# Altium PCB PCB1.PcbDoc (part 1 of 2)
Units mil, origin at the board's own origin, x right, y up, seen from the top; angles counter-clockwise.
Board outline 13600 x 4300 mil, 2 copper layers (Top Layer, Bottom Layer); 273 components, 193 nets, 742 pads, 0 vias.
Unrouted connection lines stored in the file: 1.
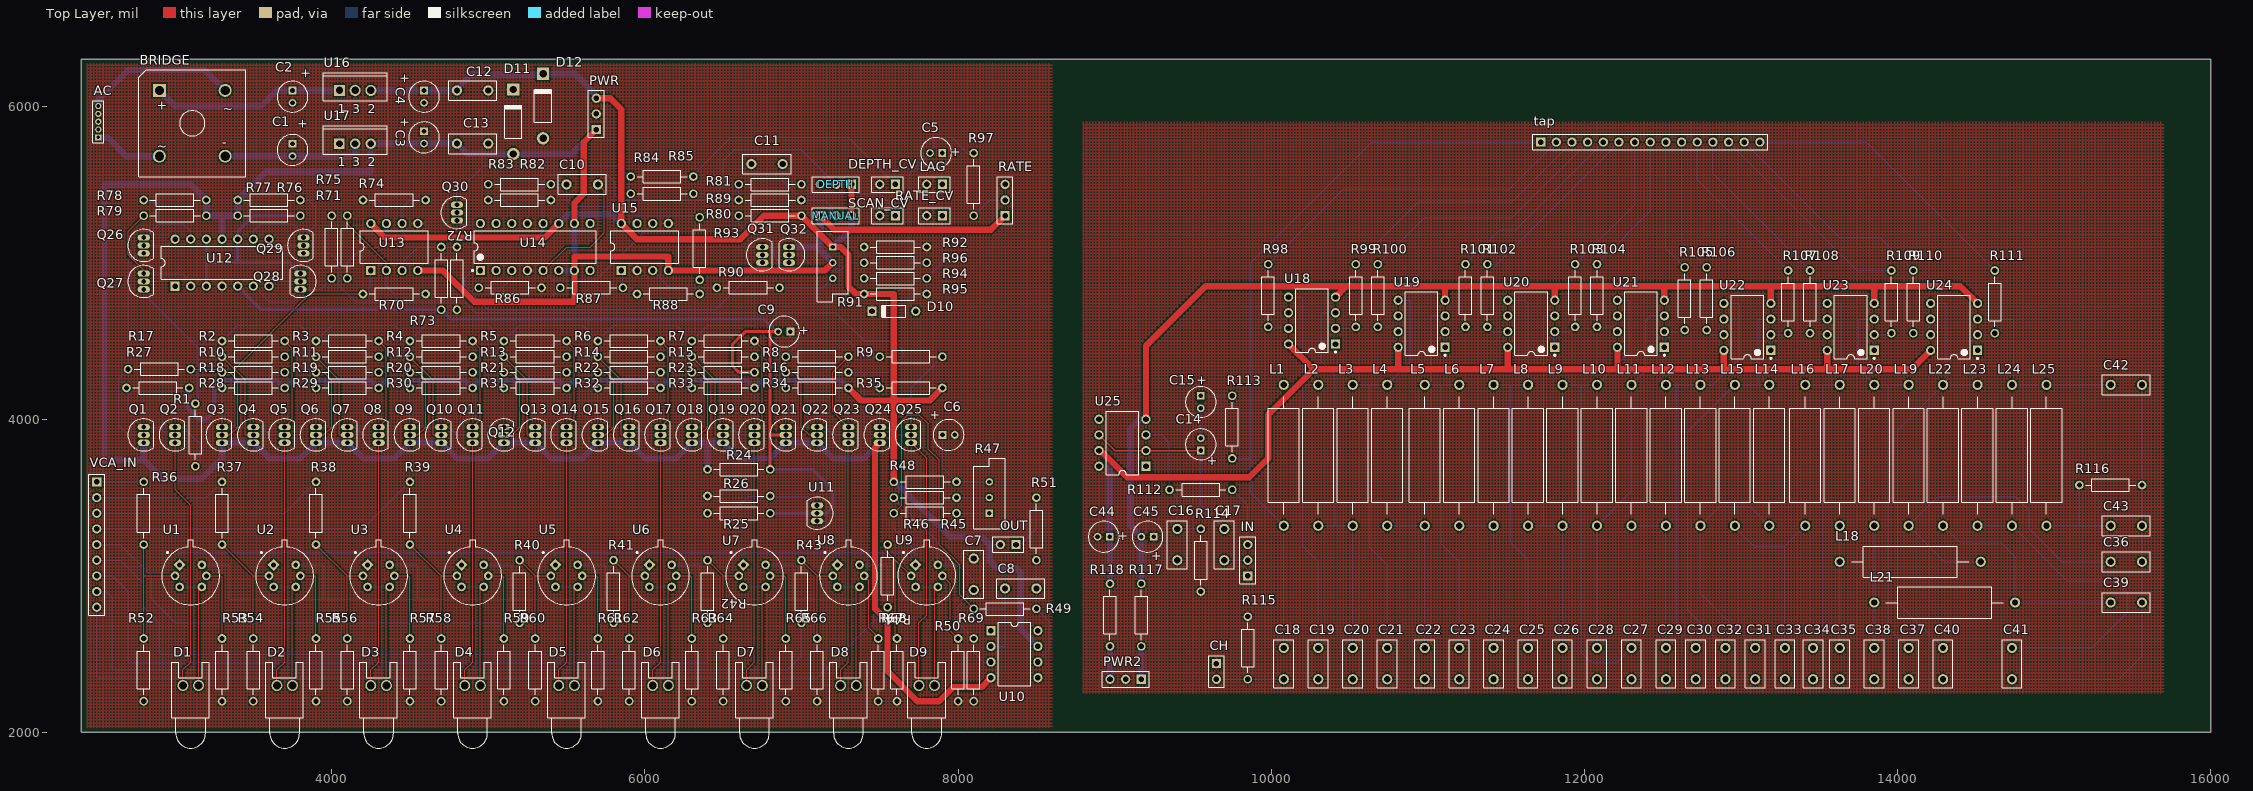
[diagram p0: Top Layer view]
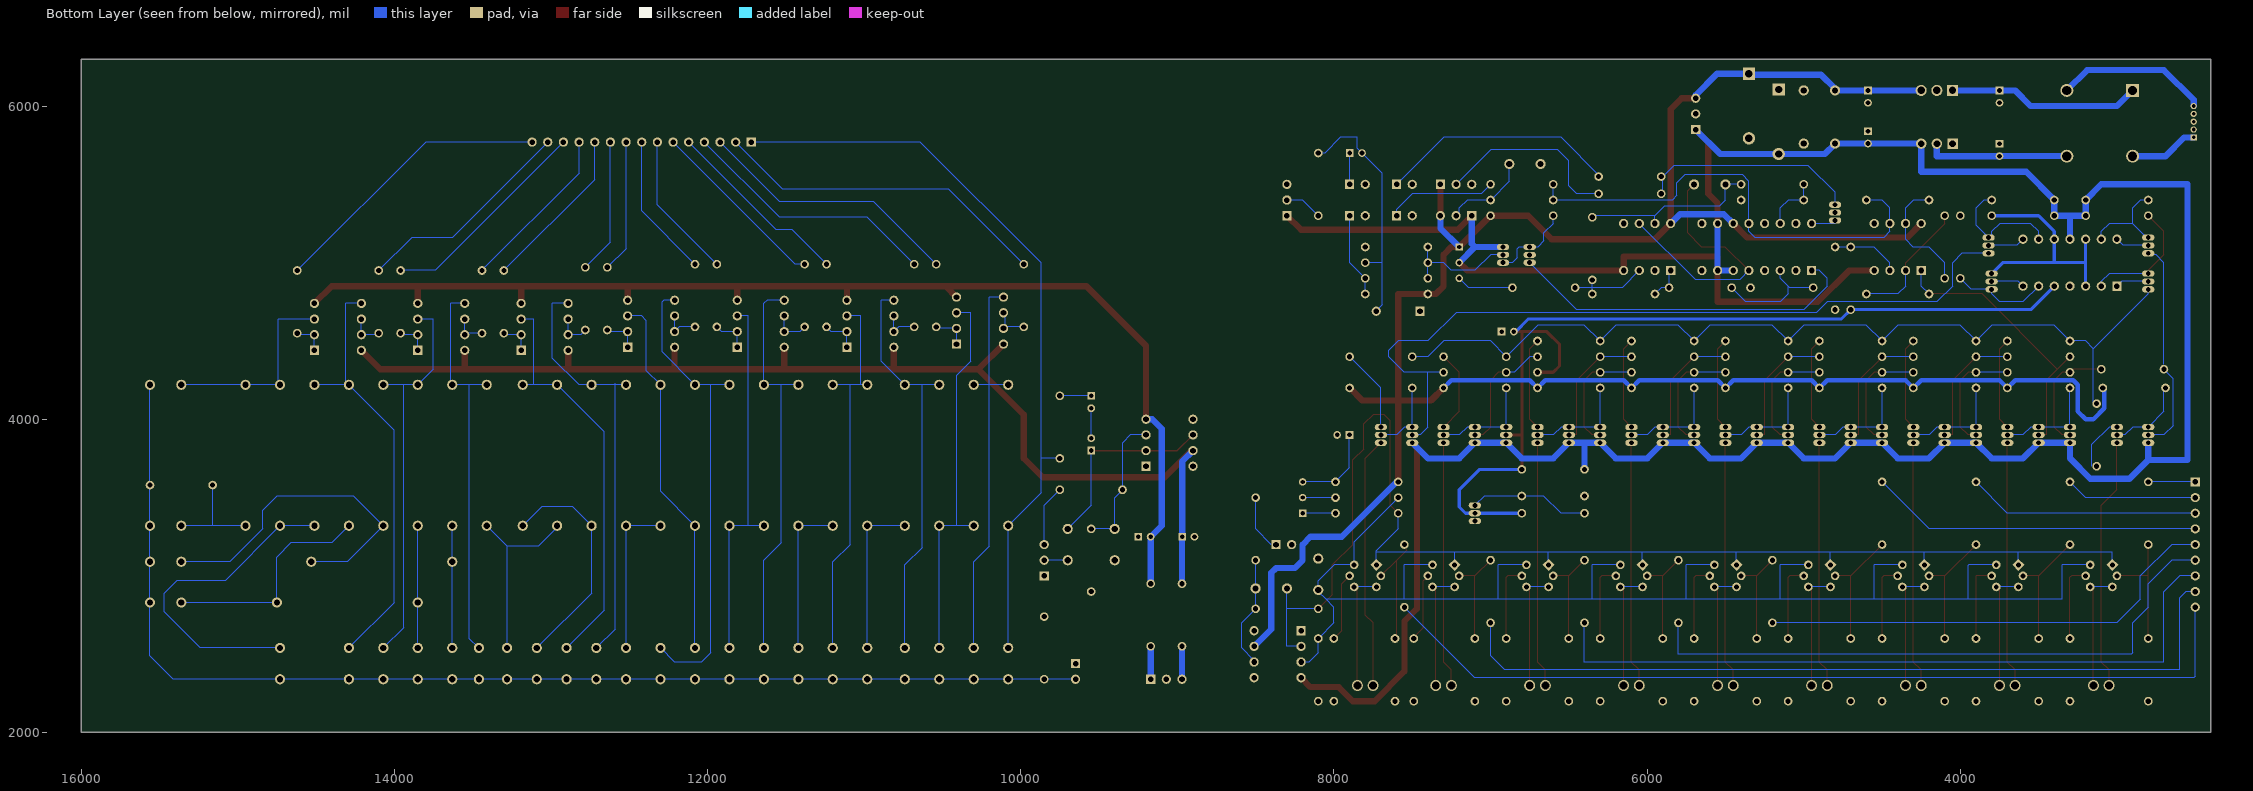
[diagram p1: Bottom Layer view, seen from below]

## Layer stack, top to bottom
Top Layer: signal copper 1.4
Dielectric: core 12.6, FR-4, Dk 4.8
Bottom Layer: signal copper 1.4

## Board outline
2400,6300 2400,2000 16000,2000 16000,6300

## Design rules (kind name [scope] priority, off if disabled: settings)
Clearance [All] p1: gap=7.87
ComponentClearance ComponentClearance_1 [All] p2: gap=10 collisioncheckmode=3 verticalgap=10 showdistances=FALSE
DiffPairsRouting DiffPairsRouting_1 [All] p2: maxlimit=10 minlimit=10 mostfreqgap=10 maxuncoupledlength=500
FanoutControl Fanout_LCC [IsLCC] p1: bgadir=Out bgaviamode=Centered fanoutstyle=Auto fanoutdirection=Alternating viagrid=1 // Fanout_LCC (Default Rule)
FanoutControl Fanout_BGA [IsBGA] p2: bgadir=Out bgaviamode=Centered fanoutstyle=Auto fanoutdirection=Alternating viagrid=1 // Fanout_BGA (Default Rule)
FanoutControl Fanout_Default [All] p4: bgadir=Out bgaviamode=Centered fanoutstyle=Auto fanoutdirection=Alternating viagrid=1 // Fanout_Default (Default Rule)
FanoutControl Fanout_Small [(CompPinCount < 5)] p5: bgadir=Out bgaviamode=Centered fanoutstyle=Auto fanoutdirection=OutThenIn viagrid=1 // Fanout_Small (Default Rule)
FanoutControl Fanout_BGA_1 [IsBGA] p6: bgadir=Out bgaviamode=Centered fanoutstyle=Auto fanoutdirection=Alternating viagrid=1 // Fanout_BGA (Default Rule)
FanoutControl Fanout_LCC_1 [IsLCC] p7: bgadir=Out bgaviamode=Centered fanoutstyle=Auto fanoutdirection=Alternating viagrid=1 // Fanout_LCC (Default Rule)
FanoutControl Fanout_SOIC_1 [IsSOIC] p8: bgadir=Out bgaviamode=Centered fanoutstyle=Auto fanoutdirection=Alternating viagrid=1 // Fanout_SOIC (Default Rule)
FanoutControl Fanout_Small_1 [(CompPinCount < 5)] p9: bgadir=Out bgaviamode=Centered fanoutstyle=Auto fanoutdirection=OutThenIn viagrid=1 // Fanout_Small (Default Rule)
FanoutControl Fanout_Default_1 [All] p10: bgadir=Out bgaviamode=Centered fanoutstyle=Auto fanoutdirection=Alternating viagrid=1 // Fanout_Default (Default Rule)
Height Height_1 [All] p2: minheight=0 maxheight=1000 prefheight=500
HoleSize HoleSize_1 [All] p2: absolutevalues=TRUE maxlimit=100 minlimit=1 maxpercent=80.000 minpercent=20.000
LayerPairs LayerPairs_1 [All] p2: enforce=TRUE
PasteMaskExpansion PasteMaskExpansion_1 [All] p2: expansion=0
PlaneClearance PlaneClearance_1 [All] p2: clearance=20
PolygonConnect [All] p1: connectstyle=Relief reliefconductorwidth=10 reliefentries=4 polygonreliefangle="90 Angle"
PolygonConnect PolygonConnect_1 [All] p2: connectstyle=Relief reliefconductorwidth=10 reliefentries=4 polygonreliefangle="90 Angle"
RoomDefinition Sheet1 [InComponentClass('Sheet1')] p1: confinementstyle=ConfineIn formatcopy=TRUE lockcomponents=FALSE outline 2430,2020 8610,2020 8610,6280 2430,6280
RoomDefinition Sheet2 [InComponentClass('Sheet2')] p2: confinementstyle=ConfineIn formatcopy=TRUE lockcomponents=FALSE outline 8730,2200 15740,2200 15740,5960 8730,5960
RoutingPriority RoutingPriority_1 [All] p2: routingpriority=0
RoutingTopology RoutingTopology_1 [All] p2: topology=Shortest
RoutingVias [All] p1: holewidth=23.62 width=39.37 viastyle="Through Hole" minholewidth=28 minwidth=50 maxholewidth=28 maxwidth=50
ShortCircuit ShortCircuit_1 [All] p2: allowed=FALSE
SilkscreenOverComponentPads [All] p1: minsilkscreentomaskgap=10
SolderMaskExpansion [All] p1: expansion=4
SolderMaskExpansion SolderMaskExpansion_1 [All] p2: expansion=4
TestPointUsage [All] p1: valid=0 allowmultiple=FALSE
TestPointUsage TestPointUsage_1 [All] p2: valid=0 allowmultiple=FALSE
Testpoint [All] p1: side=15 testpointundercomponent=TRUE minsize=40 maxsize=100 preferedsize=60 minholesize=0 maxholesize=40 preferedholesize=32 testpointgrid=1 style=1023 order=0-112345678
Testpoint Testpoint_1 [All] p2: side=15 testpointundercomponent=TRUE minsize=40 maxsize=100 preferedsize=60 minholesize=0 maxholesize=40 preferedholesize=32 testpointgrid=1 style=1023 order=0123456789
UnRoutedNet UnRoutedNet_1 [All] p2:
Width [All] p1: maxlimit=7.87 minlimit=7.87 preferedwidth=7.87
19 further rules are at their usual default settings.

## Classes and differential pairs
component class Sheet2: C14 C15 C16 C17 C18 C19 C20 C21 C22 C23 C24 C25 C26 C27 C28 C29 C30 C31 C32 C33 C34 C35 C36 C37 C38 C39 C40 C41 C42 C43 C44 C45 CH IN L1 L2 L3 L4 L5 L6 L7 L8 L9 L10 L11 L12 L13 L14 L15 L16 L17 L18 L19 L20 L21 L22 L23 L24 L25 PWR2 R98 R99 R100 R101 R102 R103 R104 R105 R106 R107 R108 R109 R110 R111 R112 R113 R114 R115 R116 R117 R118 tap U18 U19 U20 U21 U22 U23 U24 U25
component class Sheet1: AC BRIDGE C1 C2 C3 C4 C5 C6 C7 C8 C9 C10 C11 C12 C13 D1 D2 D3 D4 D5 D6 D7 D8 D9 D10 D11 D12 DEPTH DEPTH_CV LAG MANUAL OUT PWR Q1 Q2 Q3 Q4 Q5 Q6 Q7 Q8 Q9 Q10 Q11 Q12 Q13 Q14 Q15 Q16 Q17 Q18 Q19 Q20 Q21 Q22 Q23 Q24 Q25 Q26 Q27 Q28 Q29 Q30 Q31 Q32 R1 R2 R3 R4 R5 R6 R7 R8 R9 R10 R11 R12 R13 R14 R15 R16 R17 R18 R19 R20 R21 R22 R23 R24 R25 R26 R27 R28 R29 R30 R31 R32 R33 R34 R35 R36 R37 R38 R39 R40 R41 R42 R43 R44 R45 R46 R47 R48 R49 R50 R51 R52 R53 R54 R55 R56 R57 R58 R59 R60 R61 R62 R63 R64 R65 R66 R67 R68 R69 R70 R71 R72 R73 R74 R75 R76 R77 R78 R79 R80 R81 R82 R83 R84 R85 R86 R87 R88 R89 R90 R91 R92 R93 R94 R95 R96 R97 RATE RATE_CV SCAN_CV U1 U2 U3 U4 U5 U6 U7 U8 U9 U10 U11 U12 U13 U14 U15 U16 U17 VCA_IN

## Components (designator, comment, footprint, x,y, rotation, side; value= is the part's Value field where it differs from the comment)
AC "MHDR1X5" MHDR1X5 2510,5800 r90 top
BRIDGE "Bridge2" D-46_6A 3110,5890 r0 top
C1 "Cap Pol1" B 3750,5720 r270 top
C2 "Cap Pol1" B 3750,6060 r270 top
C3 "Cap Pol1" B 4590,5800 r270 top
C4 "Cap Pol1" B 4590,6060 r270 top
C5 "Cap Pol1" B 7860,5700 r180 top
C6 "Cap Pol1" B 7940,3900 r0 top
C7 "Cap" VP45-3.2 8100,3010 r270 top
C8 "Cap" VP45-3.2 8400,2920 r180 top
C9 "Cap Pol1" B 6890,4560 r180 top
C10 "Cap" VP45-3.2 5600,5500 r0 top
C11 "Cap" VP45-3.2 6780,5630 r180 top
C12 "Cap" VP45-3.2 4900,6100 r0 top
C13 "Cap" VP45-3.2 4900,5760 r180 top
C14 "Cap Pol1" B 9550,3840 r90 top
C15 "Cap Pol1" B 9550,4110 r270 top
C16 "Cap" VP45-3.2 9400,3200 r90 top
C17 "Cap" VP45-3.2 9700,3200 r270 top
C18 "Cap" VP45-3.2 10080,2440 r90 top
C19 "Cap" VP45-3.2 10300,2440 r90 top
C20 "Cap" VP45-3.2 10520,2440 r90 top
C21 "Cap" VP45-3.2 10740,2440 r90 top
C22 "Cap" VP45-3.2 10980,2440 r90 top
C23 "Cap" VP45-3.2 11200,2440 r90 top
C24 "Cap" VP45-3.2 11420,2440 r90 top
C25 "Cap" VP45-3.2 11640,2440 r90 top
C26 "Cap" VP45-3.2 11860,2440 r90 top
C27 "Cap" VP45-3.2 12300,2440 r90 top
C28 "Cap" VP45-3.2 12080,2440 r90 top
C29 "Cap" VP45-3.2 12520,2440 r90 top
C30 "Cap" VP45-3.2 12710,2440 r90 top
C31 "Cap" VP45-3.2 13090,2440 r90 top
C32 "Cap" VP45-3.2 12900,2440 r90 top
C33 "Cap" VP45-3.2 13280,2440 r90 top
C34 "Cap" VP45-3.2 13460,2440 r90 top
C35 "Cap" VP45-3.2 13630,2440 r90 top
C36 "Cap" VP45-3.2 15460,3090 r180 top
C37 "Cap" VP45-3.2 14070,2440 r90 top
C38 "Cap" VP45-3.2 13850,2440 r90 top
C39 "Cap" VP45-3.2 15460,2830 r180 top
C40 "Cap" VP45-3.2 14290,2440 r90 top
C41 "Cap" VP45-3.2 14730,2440 r90 top
C42 "Cap" VP45-3.2 15460,4220 r180 top
C43 "Cap" VP45-3.2 15460,3320 r180 top
C44 "Cap Pol1" B 8930,3250 r180 top
C45 "Cap Pol1" B 9210,3250 r180 top
CH "Header 2" HDR1X2 9650,2440 r270 top
D1 "LED0" LED-0 3100,2300 r0 top
D2 "LED0" LED-0 3700,2300 r0 top
D3 "LED0" LED-0 4300,2300 r0 top
D4 "LED0" LED-0 4900,2300 r0 top
D5 "LED0" LED-0 5500,2300 r0 top
D6 "LED0" LED-0 6100,2300 r0 top
D7 "LED0" LED-0 6700,2300 r0 top
D8 "LED0" LED-0 7300,2300 r0 top
D9 "LED0" LED-0 7800,2300 r0 top
D10 "Diode 1N4148" DO-35 7590,4690 r180 top
D11 "Diode 1N4002" DO-41 5160,5900 r90 top
D12 "Diode 1N4002" DO-41 5350,6000 r90 top
DEPTH "Header 3" HDR1X3 7320,5500 r180 top
DEPTH_CV "Header 2" HDR1X2 7600,5500 r180 top
IN "Header 3" HDR1X3 9850,3000 r90 top
L1 "Inductor Iron" AXIAL-0.9 10080,3770 r90 top
L2 "Inductor Iron" AXIAL-0.9 10300,3770 r270 top
L3 "Inductor Iron" AXIAL-0.9 10520,3770 r90 top
L4 "Inductor Iron" AXIAL-0.9 10740,3770 r270 top
L5 "Inductor Iron" AXIAL-0.9 10980,3770 r90 top
L6 "Inductor Iron" AXIAL-0.9 11200,3770 r270 top
L7 "Inductor Iron" AXIAL-0.9 11420,3770 r90 top
L8 "Inductor Iron" AXIAL-0.9 11640,3770 r270 top
L9 "Inductor Iron" AXIAL-0.9 11860,3770 r90 top
L10 "Inductor Iron" AXIAL-0.9 12080,3770 r270 top
L11 "Inductor Iron" AXIAL-0.9 12300,3770 r270 top
L12 "Inductor Iron" AXIAL-0.9 12520,3770 r90 top
L13 "Inductor Iron" AXIAL-0.9 12740,3770 r270 top
L14 "Inductor Iron" AXIAL-0.9 13180,3770 r90 top
L15 "Inductor Iron" AXIAL-0.9 12960,3770 r270 top
L16 "Inductor Iron" AXIAL-0.9 13410,3770 r90 top
L17 "Inductor Iron" AXIAL-0.9 13630,3770 r270 top
L18 "Inductor Iron" AXIAL-0.9 14080,3090 r0 top
L19 "Inductor Iron" AXIAL-0.9 14070,3770 r90 top
L20 "Inductor Iron" AXIAL-0.9 13850,3770 r270 top
L21 "Inductor Iron" AXIAL-0.9 14300,2830 r0 top
L22 "Inductor Iron" AXIAL-0.9 14290,3770 r90 top
L23 "Inductor Iron" AXIAL-0.9 14510,3770 r270 top
L24 "Inductor Iron" AXIAL-0.9 14730,3770 r90 top
L25 "Inductor Iron" AXIAL-0.9 14950,3770 r270 top
LAG "Header 2" HDR1X2 7900,5500 r180 top
MANUAL "Header 3" HDR1X3 7120,5300 r0 top
OUT "Header 2" HDR1X2 8370,3200 r180 top
PWR "Header 3" HDR1X3 5690,5850 r90 top
PWR2 "Header 3" HDR1X3 9170,2340 r180 top
Q1 "BC560C" 29-04 2800,3900 r0 top
Q2 "BC550C" 29-04 3000,3900 r0 top
Q3 "BC560C" 29-04 3300,3900 r0 top
Q4 "BC560C" 29-04 3500,3900 r0 top
Q5 "BC550C" 29-04 3700,3900 r0 top
Q6 "BC560C" 29-04 3900,3900 r0 top
Q7 "BC560C" 29-04 4100,3900 r0 top
Q8 "BC550C" 29-04 4300,3900 r0 top
Q9 "BC560C" 29-04 4500,3900 r0 top
Q10 "BC560C" 29-04 4700,3900 r0 top
Q11 "BC550C" 29-04 4900,3900 r0 top
Q12 "BC560C" 29-04 5100,3900 r0 top
Q13 "BC560C" 29-04 5300,3900 r0 top
Q14 "BC550C" 29-04 5500,3900 r0 top
Q15 "BC560C" 29-04 5700,3900 r0 top
Q16 "BC560C" 29-04 5900,3900 r0 top
Q17 "BC550C" 29-04 6100,3900 r0 top
Q18 "BC560C" 29-04 6300,3900 r0 top
Q19 "BC560C" 29-04 6500,3900 r0 top
Q20 "BC550C" 29-04 6700,3900 r0 top
Q21 "BC560C" 29-04 6900,3900 r0 top
Q22 "BC560C" 29-04 7100,3900 r0 top
Q23 "BC550C" 29-04 7300,3900 r0 top
Q24 "BC560C" 29-04 7500,3900 r0 top
Q25 "BC550C" 29-04 7700,3900 r0 top
Q26 "BC550C" 29-04 2800,5110 r0 top
Q27 "BC550C" 29-04 2800,4880 r0 top
Q28 "BC560C" 29-04 3800,4880 r180 top
Q29 "BC550C" 29-04 3820,5110 r0 top
Q30 "BC560C" 29-04 4800,5320 r0 top
Q31 "BC560C" 29-04 6750,5050 r0 top
Q32 "BC560C" 29-04 6920,5050 r180 top
R1 "Res2" AXIAL-0.4 3130,3900 r270 top
R2 "Res2" AXIAL-0.4 3500,4500 r0 top
R3 "Res2" AXIAL-0.4 4100,4500 r0 top
R4 "Res2" AXIAL-0.4 4700,4500 r0 top
R5 "Res2" AXIAL-0.4 5300,4500 r0 top
R6 "Res2" AXIAL-0.4 5900,4500 r0 top
R7 "Res2" AXIAL-0.4 6500,4500 r0 top
R8 "Res2" AXIAL-0.4 7100,4400 r0 top
R9 "Res2" AXIAL-0.4 7700,4400 r0 top
R10 "Res2" AXIAL-0.4 3500,4400 r0 top
R11 "Res2" AXIAL-0.4 4100,4400 r0 top
R12 "Res2" AXIAL-0.4 4700,4400 r0 top
R13 "Res2" AXIAL-0.4 5300,4400 r0 top
R14 "Res2" AXIAL-0.4 5900,4400 r0 top
R15 "Res2" AXIAL-0.4 6500,4400 r0 top
R16 "Res2" AXIAL-0.4 7100,4300 r0 top
R17 "Res2" AXIAL-0.4 2900,4320 r0 top
R18 "Res2" AXIAL-0.4 3500,4300 r0 top
R19 "Res2" AXIAL-0.4 4100,4300 r0 top
R20 "Res2" AXIAL-0.4 4700,4300 r0 top
R21 "Res2" AXIAL-0.4 5300,4300 r0 top
R22 "Res2" AXIAL-0.4 5900,4300 r0 top
R23 "Res2" AXIAL-0.4 6500,4300 r0 top
R24 "Res2" AXIAL-0.4 6600,3680 r0 top
R25 "Res2" AXIAL-0.4 6600,3400 r180 top
R26 "Res2" AXIAL-0.4 6600,3510 r180 top
R27 "Res2" AXIAL-0.4 2890,4200 r0 top
R28 "Res2" AXIAL-0.4 3500,4200 r0 top
R29 "Res2" AXIAL-0.4 4100,4200 r0 top
R30 "Res2" AXIAL-0.4 4700,4200 r0 top
R31 "Res2" AXIAL-0.4 5300,4200 r0 top
R32 "Res2" AXIAL-0.4 5900,4200 r0 top
R33 "Res2" AXIAL-0.4 6500,4200 r0 top
R34 "Res2" AXIAL-0.4 7100,4200 r0 top
R35 "Res2" AXIAL-0.4 7700,4200 r0 top
R36 "Res2" AXIAL-0.4 2800,3400 r90 top
R37 "Res2" AXIAL-0.4 3300,3400 r90 top
R38 "Res2" AXIAL-0.4 3900,3400 r90 top
R39 "Res2" AXIAL-0.4 4500,3400 r90 top
R40 "Res2" AXIAL-0.4 5200,2900 r270 top
R41 "Res2" AXIAL-0.4 5800,2900 r270 top
R42 "Res2" AXIAL-0.4 6400,2900 r270 top
R43 "Res2" AXIAL-0.4 7000,2900 r270 top
R44 "Res2" AXIAL-0.4 7550,3000 r270 top
R45 "Res2" AXIAL-0.4 7790,3500 r180 top
R46 "Res2" AXIAL-0.4 7790,3400 r0 top
R47 "RPot" VR5 8200,3500 r90 top
R48 "Res2" AXIAL-0.4 7790,3600 r180 top
R49 "Res2" AXIAL-0.4 8300,2790 r180 top
R50 "Res2" AXIAL-0.4 8100,2400 r90 top
R51 "Res2" AXIAL-0.4 8500,3300 r270 top
R52 "Res2" AXIAL-0.4 2800,2400 r90 top
R53 "Res2" AXIAL-0.4 3300,2400 r90 top
R54 "Res2" AXIAL-0.4 3500,2400 r90 top
R55 "Res2" AXIAL-0.4 3900,2400 r90 top
R56 "Res2" AXIAL-0.4 4100,2400 r90 top
R57 "Res2" AXIAL-0.4 4500,2400 r90 top
R58 "Res2" AXIAL-0.4 4700,2400 r90 top
R59 "Res2" AXIAL-0.4 5100,2400 r90 top
R60 "Res2" AXIAL-0.4 5300,2400 r90 top
R61 "Res2" AXIAL-0.4 5700,2400 r90 top
R62 "Res2" AXIAL-0.4 5900,2400 r90 top
R63 "Res2" AXIAL-0.4 6300,2400 r90 top
R64 "Res2" AXIAL-0.4 6500,2400 r90 top
R65 "Res2" AXIAL-0.4 6900,2400 r90 top
R66 "Res2" AXIAL-0.4 7100,2400 r90 top
R67 "Res2" AXIAL-0.4 7490,2400 r90 top
R68 "Res2" AXIAL-0.4 7610,2400 r90 top
R69 "Res2" AXIAL-0.4 8000,2400 r90 top
R70 "Res2" AXIAL-0.4 4400,4800 r180 top
R71 "Res2" AXIAL-0.4 4100,5100 r90 top
R72 "Res2" AXIAL-0.4 4800,4900 r270 top
R73 "Res2" AXIAL-0.4 4700,4900 r90 top
R74 "Res2" AXIAL-0.4 4400,5400 r180 top
R75 "Res2" AXIAL-0.4 4000,5100 r90 top
R76 "Res2" AXIAL-0.4 3600,5300 r0 top
R77 "Res2" AXIAL-0.4 3600,5400 r0 top
R78 "Res2" AXIAL-0.4 3000,5400 r180 top
R79 "Res2" AXIAL-0.4 3000,5300 r180 top
R80 "Res2" AXIAL-0.4 6800,5400 r180 top
R81 "Res2" AXIAL-0.4 6800,5500 r180 top
R82 "Res2" AXIAL-0.4 5200,5400 r180 top
R83 "Res2" AXIAL-0.4 5200,5500 r0 top
R84 "Res2" AXIAL-0.4 6110,5440 r180 top
R85 "Res2" AXIAL-0.4 6110,5550 r180 top
R86 "Res2" AXIAL-0.4 5140,4840 r0 top
R87 "Res2" AXIAL-0.4 5660,4840 r180 top
R88 "Res2" AXIAL-0.4 6150,4800 r180 top
R89 "Res2" AXIAL-0.4 6350,5090 r90 top
R90 "Res2" AXIAL-0.4 6660,4840 r0 top
R91 "RPot" VR5 7200,5000 r270 top
R92 "Res2" AXIAL-0.4 7600,5100 r180 top
R93 "Res2" AXIAL-0.4 6800,5300 r180 top
R94 "Res2" AXIAL-0.4 7600,4900 r180 top
R95 "Res2" AXIAL-0.4 7600,4800 r180 top
R96 "Res2" AXIAL-0.4 7600,5000 r180 top
R97 "Res2" AXIAL-0.4 8100,5500 r90 top
R98 "Res2" AXIAL-0.4 9980,4790 r90 top
R99 "Res2" AXIAL-0.4 10540,4790 r90 top
R100 "Res2" AXIAL-0.4 10680,4790 r90 top
R101 "Res2" AXIAL-0.4 11240,4790 r90 top
R102 "Res2" AXIAL-0.4 11380,4790 r90 top
R103 "Res2" AXIAL-0.4 11940,4790 r90 top
R104 "Res2" AXIAL-0.4 12080,4790 r90 top
R105 "Res2" AXIAL-0.4 12640,4770 r90 top
R106 "Res2" AXIAL-0.4 12780,4770 r90 top
R107 "Res2" AXIAL-0.4 13300,4750 r90 top
R108 "Res2" AXIAL-0.4 13440,4750 r90 top
R109 "Res2" AXIAL-0.4 13960,4750 r90 top
R110 "Res2" AXIAL-0.4 14100,4750 r90 top
R111 "Res2" AXIAL-0.4 14620,4750 r90 top
R112 "Res2" AXIAL-0.4 9550,3550 r0 top
R113 "Res2" AXIAL-0.4 9750,3950 r270 top
R114 "Res2" AXIAL-0.4 9550,3100 r90 top
R115 "Res2" AXIAL-0.4 9850,2540 r270 top
R116 "Res2" AXIAL-0.4 15360,3580 r180 top
R117 "Res2" AXIAL-0.4 9170,2750 r270 top
R118 "Res2" AXIAL-0.4 8970,2750 r270 top
RATE "Header 3" HDR1X3 8300,5300 r90 top
RATE_CV "Header 2" HDR1X2 7900,5300 r180 top
SCAN_CV "Header 2" HDR1X2 7600,5300 r180 top
tap "Header 15" HDR1X15 11720,5770 r0 top
U1 "LM394BH" H06C 3100,3000 r315 top
U2 "LM394BH" H06C 3700,3000 r315 top
U3 "LM394BH" H06C 4300,3000 r315 top
U4 "LM394BH" H06C 4900,3000 r315 top
U5 "LM394BH" H06C 5500,3000 r315 top
U6 "LM394BH" H06C 6100,3000 r315 top
U7 "LM394BH" H06C 6700,3000 r315 top
U8 "LM394BH" H06C 7300,3000 r315 top
U9 "LM394BH" H06C 7800,3000 r315 top
U10 "TL071JG" JG008 8360,2500 r270 top
U11 "TL431ACLP" LP03 7100,3400 r180 top
U12 "LM324N" 646-06 3300,5000 r0 top
U13 "TL072CN" DIP8 4400,5100 r0 top
U14 "LM13700N" N16E 5300,5100 r90 top
U15 "TL072CN" DIP8 6000,5100 r0 top
U16 "L7815CP" ISOWATT220AB 4150,6100 r0 top
U17 "L7915CV" TO220V 4150,5760 r0 top
U18 "LF412CN" N08E 10260,4630 r180 top
U19 "LF412CN" N08E 10960,4610 r180 top
U20 "LF412CN" N08E 11660,4610 r180 top
U21 "LF412CN" N08E 12360,4610 r180 top
U22 "LF412CN" N08E 13040,4590 r180 top
U23 "LF412CN" N08E 13700,4590 r180 top
U24 "LF412CN" N08E 14360,4590 r180 top
U25 "TL071JG" JG008 9050,3850 r90 top
VCA_IN "Header 9" HDR1X9 2500,3600 r270 top

## Footprints (in the part's own frame and the unit in brackets; to place one, negate y for a bottom-side part, rotate by r counter-clockwise, add the part's x,y. Pads: shape width x height; smd on the part's side, far side on the other; paste and mask are expansions set on the pad)
29-04 [mm] "TO, Flat Index; 3 In-Line, Axial Leads; Body Dia. 4.8mm; Leads 0.48 x 0.5 mm (max)"
  oval 2x1 hole 0.8: 1(0,-1.27) 2(0,0) 3(0,1.27)
  silkscreen extent -2.6,-2.6 1.6,2.6
646-06 [mm] "DIP; 14 Leads; Row Spacing 7.62 mm; Pitch 2.54 mm"
  rect 1.5x1.5 hole 0.9: 1(-7.62,-3.81)
  round 1.5 hole 0.9: 2(-5.08,-3.81) 3(-2.54,-3.81) 4(0,-3.81) 5(2.54,-3.81) 6(5.08,-3.81) 7(7.62,-3.81) 8(7.62,3.81) 9(5.08,3.81) 10(2.54,3.81) 11(0,3.81) 12(-2.54,3.81) 13(-5.08,3.81) 14(-7.62,3.81)
  silkscreen extent -9.85,-2.65 9.85,2.65
AXIAL-0.4 [mm] "Resistor; 2 Leads"
  round 1.4 hole 0.85: 1(-5.08,0) 2(5.08,0)
  silkscreen extent -4.06,-1.02 4.06,1.02
AXIAL-0.9 [mm] "Magnetic-Core Inductor; 2 Leads"
  round 1.65 hole 1: 1(-11.43,0) 2(11.43,0)
  silkscreen extent -9.53,-2.54 9.53,2.54
B [mm] "Capacitor, Electrolytic, Radial; Body 5 x 6.8 mm (Dia.xH typ); Pin Spacing 2 mm (typ)"
  rect 1.25x1.25 hole 0.75: 1(-1,0)
  round 1.25 hole 0.75: 2(1,0)
  silkscreen extent -2.5,-2.5 2.5,2.5
D-46_6A [mm] "Bridge Rectifier; 4 Terminals; Body 16.8 x 16.8 mm (typ); Pitch 10.67 mm"
  rect 2.1x2.1 hole 1.5: 1(-5.335,5.335)
  round 2.1 hole 1.5: 2(-5.335,-5.335) 3(5.335,-5.335) 4(5.335,5.335)
  silkscreen extent -8.65,-8.65 8.65,8.65
DIP8 [mm] "DIP; 8 Leads; Row Spacing 7.62 mm; Pitch 2.54 mm"
  rect 1.5x1.5 hole 0.9: 1(-3.81,-3.81)
  round 1.5 hole 0.9: 2(-1.27,-3.81) 3(1.27,-3.81) 4(3.81,-3.81) 5(3.81,3.81) 6(1.27,3.81) 7(-1.27,3.81) 8(-3.81,3.81)
  silkscreen extent -5.5,-2.65 5.5,2.65
DO-35 [mm] "Diode, Axial; Body 3.8 x 1.9 mm (LxDia. max), Lead Dia. 0.53 mm (max)"
  round 1.5 hole 0.9: 1(-3.55,0)
  rect 1.5x1.5 hole 0.9: 2(3.55,0)
  silkscreen extent -1.95,-0.95 2.05,0.95
DO-41 [mm] "Diode, Axial; Body 5.2 x 2.7 mm (LxDia. max), Lead Dia. 0.86 mm (max)"
  round 2 hole 1.2: 1(-5.23,0)
  rect 2x2 hole 1.2: 2(5.23,0)
  silkscreen extent -2.65,-1.41 2.75,1.4
H06C [mm] "Can; 8 Leads (2 Absent); Pin Circle Dia. 5.08 mm; Lead Dia. 0.48 mm (max)"
  rect 1.4x1.4 hole 0.8: 1(-2.54,0)
  round 1.4 hole 0.8: 2(-1.796,-1.796) 3(0,-2.54) 4(2.54,0) 5(1.796,1.796) 6(0,2.54)
  silkscreen extent -5.47,-4.7 4.7,4.7, body extent -4.71,-4.71 4.71,4.71, height 5.56
HDR1X2 [mm] "Connector; Header; 2 Position"
  rect 1.5x1.5 hole 0.9: 1(0,0)
  round 1.5 hole 0.9: 2(2.54,0)
  silkscreen extent -1.27,-1.27 3.81,1.27
HDR1X3 [mm] "Connector; Header; 3 Position"
  rect 1.5x1.5 hole 0.9: 1(0,0)
  round 1.5 hole 0.9: 2(2.54,0) 3(5.08,0)
  silkscreen extent -1.27,-1.27 6.35,1.27
HDR1X9 [mm] "Connector; Header; 9 Position"
  rect 1.5x1.5 hole 0.9: 1(0,0)
  round 1.5 hole 0.9: 2(2.54,0) 3(5.08,0) 4(7.62,0) 5(10.16,0) 6(12.7,0) 7(15.24,0) 8(17.78,0) 9(20.32,0)
  silkscreen extent -1.27,-1.27 21.59,1.27
HDR1X15 [mm] "Connector; Header; 15 Position"
  rect 1.5x1.5 hole 0.9: 1(0,0)
  round 1.5 hole 0.9: 2(2.54,0) 3(5.08,0) 4(7.62,0) 5(10.16,0) 6(12.7,0) 7(15.24,0) 8(17.78,0) 9(20.32,0) 10(22.86,0) 11(25.4,0) 12(27.94,0) 13(30.48,0) 14(33.02,0) 15(35.56,0)
  silkscreen extent -1.27,-1.27 36.83,1.27
ISOWATT220AB [mm] "TO, Thru-Hole, Vertical, Heatsink Mounted; 3 In-Line Leads; Pitch 2.54 mm; Pin sequence 1, 3, 2"
  rect 1.8x1.8 hole 1.2: 1(-2.54,0)
  round 1.8 hole 1.2: 2(2.54,0) 3(0,0)
  silkscreen extent -5.2,-1.7 5.2,2.9
JG008 [mm] "DIP; 8 Leads; Row Spacing 7.62 mm; Pitch 2.54 mm"
  rect 1.5x1.5 hole 0.9: 1(-3.81,-3.81)
  round 1.5 hole 0.9: 2(-1.27,-3.81) 3(1.27,-3.81) 4(3.81,-3.81) 5(3.81,3.81) 6(1.27,3.81) 7(-1.27,3.81) 8(-3.81,3.81)
  silkscreen extent -5.15,-2.65 5.15,2.65
LED-0 [mil] "Typical INFRARED GaAs LED; 2 Leads"
  round 70 hole 50: 1(50,0) 2(-50,0)
  silkscreen extent -120,-400 120,150
LP03 [mm] "TO, Flat Index; 3 In-Line, Axial Leads; Body Dia. 4.8mm; Leads 0.56 x 0.41 mm (max)"
  oval 2x1 hole 0.8: 1(0,-1.27) 2(0,0) 3(0,1.27)
  silkscreen extent -2.6,-2.6 1.6,2.6
MHDR1X5 [mm] "Connector; Header; 5 Position"
  rect 1x1 hole 0.6: 1(0,0)
  round 1 hole 0.6: 2(1.27,0) 3(2.54,0) 4(3.81,0) 5(5.08,0)
  silkscreen extent -0.9,-0.9 5.98,0.9
N08E [mm] "DIP, 8-Leads, Row Spacing 7.62mm, Pitch 2.54mm, Body 9.91x6.35mm"
  rect 1.5x1.5 hole 0.9: 1(-3.81,3.81)
  round 1.5 hole 0.9: 2(-3.81,1.27) 3(-3.81,-1.27) 4(-3.81,-3.81) 5(3.81,-3.81) 6(3.81,-1.27) 7(3.81,1.27) 8(3.81,3.81)
  silkscreen extent -3.94,-5.15 2.65,5.23, body extent -3.6,-5.15 3.6,5.15, height 5.34
N16E [mm] "DIP, 16-Leads, Row Spacing 7.62mm, Pitch 2.54mm, Body 19.3x6.35mm"
  rect 1.5x1.5 hole 0.9: 1(-3.81,8.89)
  round 1.5 hole 0.9: 2(-3.81,6.35) 3(-3.81,3.81) 4(-3.81,1.27) 5(-3.81,-1.27) 6(-3.81,-3.81) 7(-3.81,-6.35) 8(-3.81,-8.89) 9(3.81,-8.89) 10(3.81,-6.35) 11(3.81,-3.81) 12(3.81,-1.27) 13(3.81,1.27) 14(3.81,3.81) 15(3.81,6.35) 16(3.81,8.89)
  silkscreen extent -3.93,-9.9 2.65,10.31, body extent -3.3,-9.9 3.3,9.9, height 4.32
TO220V [mm] "TO, Thru-Hole, Vertical, Heatsink Mounted; 3 In-Line Leads; Pitch 2.54 mm; Pin sequence 1, 3, 2"
  rect 1.7x1.7 hole 1.1: 1(-2.54,0)
  round 1.7 hole 1.1: 2(2.54,0) 3(0,0)
  silkscreen extent -5.2,-1.7 5.2,2.9
VP45-3.2 [mm] "Capacitor, Ceramic, Thru-Hole, Dipped Radial; Body 7.8 x 3.2 mm (WxT) Pin Spacing 5.08 mm (typ)"
  round 1.65 hole 1: 1(-2.54,0) 2(2.54,0)
  silkscreen extent -3.9,-1.6 3.9,1.6
VR5 [mm] "Potentiometer; 3 Leads"
  rect 1.2x1.2 hole 0.7: 1(-2.54,0)
  round 1.2 hole 0.7: 2(0,0) 3(2.54,0)
  silkscreen extent -5.08,-2.54 6.35,2.54

## Part data
AC: "Header, 5-Pin"
BRIDGE: "Diode Bridge"
C1 C2 C3 C4 C5 C6 C9 C14 C15 C44 C45: "Polarized Capacitor (Radial)"
C7 C8 C10 C11 C12 C13 C16 C17 C18 C19 C20 C21 C22 C23 C24 C25 C26 C27 C28 C29 C30 C31 C32 C33 C34 C35 C36 C37 C38 C39 C40 C41 C42 C43: "Capacitor"
CH DEPTH_CV LAG OUT RATE_CV SCAN_CV: "Header, 2-Pin"
D1 D2 D3 D4 D5 D6 D7 D8 D9: "Typical INFRARED GaAs LED"
D10: "High Conductance Fast Diode"
D11 D12: "1 Amp General Purpose Rectifier"
DEPTH IN MANUAL PWR PWR2 RATE: "Header, 3-Pin"
L1 L2 L3 L4 L5 L6 L7 L8 L9 L10 L11 L12 L13 L14 L15 L16 L17 L18 L19 L20 L21 L22 L23 L24 L25: "Magnetic-Core Inductor"
Q1 Q3 Q4 Q6 Q7 Q9 Q10 Q12 Q13 Q15 Q16 Q18 Q19 Q21 Q22 Q24 Q28 Q30 Q31 Q32: "Low Noise Transistor PNP Silicon"
Q2 Q5 Q8 Q11 Q14 Q17 Q20 Q23 Q25 Q26 Q27 Q29: library part BC548C, "Amplifier Transistor NPN Silicon"
R1 R2 R3 R4 R5 R6 R7 R8 R9 R10 R11 R12 R13 R14 R15 R16 R17 R18 R19 R20 R21 R22 R23 R24 R25 R26 R27 R28 R29 R30 R31 R32 R33 R34 R35 R36 R37 R38 R39 R40 R41 R42 R43 R44 R45 R46 R48 R49 R50 R51 R52 R53 R54 R55 R56 R57 R58 R59 R60 R61 R62 R63 R64 R65 R66 R67 R68 R69 R70 R71 R72 R73 R74 R75 R76 R77 R78 R79 R80 R81 R82 R83 R84 R85 R86 R87 R88 R89 R90 R92 R93 R94 R95 R96 R97 R98 R99 R100 R101 R102 R103 R104 R105 R106 R107 R108 R109 R110 R111 R112 R113 R114 R115 R116 R117 R118: "Resistor"
R47 R91: "Potentiometer"
tap: "Header, 15-Pin"
U1 U2 U3 U4 U5 U6 U7 U8 U9: "Supermatch Pair"
U10 U25: "Low-Noise JFET-Input Operational Amplifier"
U11: "Adjustable Precision Shunt Regulator"
U12: "Quad Low-Power Operational Amplifier"
U13 U15: "Low-Noise J-FET Dual Operational Amplifier"
U14: "Dual Operational Transconductance Amplifier with Linearizing Diodes and Buffers"
U16: "Positive Voltage Regulator"
U17: "Negative Voltage Regulator"
U18 U19 U20 U21 U22 U23 U24: "Low Offset, Low Drift Dual JFET Input Operational Amplifier"
VCA_IN: "Header, 9-Pin"

## Nets (pads, with @x,y where several pads share a name; then routed paths per layer and width w, separated by ;. In a path a pad name is that pad's centre, name@x,y a point inside that pad or via, vN(x,y) a via of type N, cw(c..) or ccw(c..) an arc to the next point about the centre after c; other vN are vias at no path point)
+15: C4.1 C12.1 D12.2 DEPTH.1 MANUAL.3 PWR.3 R27.2 R28.2 R29.2 R30.2 R31.2 R32.2 R33.2 R34.2 R35.2 R48.2 R91.1 R93.1 R95.2 U10.7 U13.8 U14.11 U15.8 U16.2 | length 15185.3
  Top Layer w40: U13.8@4250,5250 4340,5160 5360,5160 U14.11@5450,5250 ; PWR.3@5690,6050 5780,6050 5850,5980 U15.8@5850,5250 5950,5150 6610,5150 6760,5300 R93.1@7000,5300 R91.1@7200,5100 7250,5100 7300,5050 7300,4850 7350,4800 R95.2@7400,4800 7590,4800 7590,4120 ; R34.2@7300,4200 7380,4120 7590,4120 ; MANUAL.3@7320,5300 DEPTH.1@7320,5500 ; R48.2@7590,3600 7590,4120 ; R35.2@7900,4200 7820,4120 7590,4120
  Bottom Layer w7.87: C12.1@4800,6100 C12.1@4800,6110 ; R48.2@7590,3600 R48.2@7600,3600
  Bottom Layer w29: R27.2@3080,4200 3080,4070 3150,4000 3200,4000 3250,4050 3250,4150 ; 3250,4134.32 3250,4150 ; R34.2@7300,4200 7250,4250 6750,4250 R33.2@6700,4200 6650,4250 6150,4250 R32.2@6100,4200 6050,4250 5550,4250 R31.2@5500,4200 5450,4250 4950,4250 R30.2@4900,4200 4850,4250 4350,4250 R29.2@4300,4200 4250,4250 3750,4250 R28.2@3700,4200 3650,4250 3279.38,4250 3250,4220.62 3250,4205.68 3250,4150
  Bottom Layer w40: U16.2@4250,6100 C4.1@4589.37,6100 ; C4.1@4590,6099.37 C12.1@4799.37,6099.37 ; C12.1@4800,6110 4890,6200 D12.2@5374.09,6200 ; D12.2@5350,6205.91 5554.09,6205.91 PWR.3@5690,6070 ; U14.11@5450,5250 5510,5310 5790,5310 U15.8@5850,5250 ; R91.1@7200,5100 7320,5220 MANUAL.3@7320,5300 ; R48.2@7600,3600 7950,3250 8150,3250 8200,3200 8200,3100 8250,3050 8370,3050 8400,3020 8400,2660 U10.7@8510,2550
-6: C9.2 Q21.2 R23.2 R24.2 R25.1 R73.1 U11.2 U12.5 | length 6170.7
  Top Layer w7.87: 6850,3900 6860,3900 Q21.2@6900,3900
  Top Layer w20: R23.2@6700,4300 6600,4300 6560,4340 6560,4480 6640,4560 6850,4560 C9.2@6850.18,4559.55 ; R24.2@6800,3680 6800,3900 ; 6800,4560 6800,3900 ; 6860,3900 6800,3900
  Bottom Layer w20: U12.5@3400,4850 3550,4700 R73.1@4700,4700 4760,4640 6760,4640 6840,4560 C9.2@6860,4560 ; R25.1@6800,3400 U11.2@7100,3400 7160,3400 7200,3440 7200,3550 7070,3680 R24.2@6800,3680
-13: Q28.1 R76.2 U12.3 U12.10 U12.12 | length 1570.4
  Bottom Layer w20: U12.3@3200,4850 3200,5000 ; U12.12@3200,5150 3200,5000 ; 3400,5000 U12.10@3400,5150 3400,5200 3500,5300 R76.2@3800,5300 ; Q28.1@3800,4930 3730,5000 3350,5000 3200,5000
-15: C3.2 C13.2 D11.1 MANUAL.1 PWR.1 Q1.1 Q3.1 Q4.1 Q6.1 Q7.1 Q9.1 Q10.1 Q12.1 Q13.1 Q15.1 Q16.1 Q18.1 Q19.1 Q21.1 Q22.1 Q24.1 Q32.1 R24.1 R76.1 R77.1 R78.1 R79.1 R91.2 RATE.1 U10.4 U12.11 U13.4 U14.6 U14.7 U14.10 U15.4 U17.2 | length 19934
  Top Layer w40: U13.4@4550,4950 4710,4950 4910,4750 5550,4750 U14.7@5550,4950 5550,5040 6150,5040 U15.4@6150,4950 7150,4950 R91.2@7200,5000 ; U14.10@5550,5250 5550,5380 5610,5440 5610,5770 PWR.1@5690,5850 ; MANUAL.1@7120,5300 7210,5210 8210,5210 RATE.1@8300,5300 ; Q24.1@7500,3850 7470,3820 7470,2790 7550,2710 7550,2390 7740,2200 7880,2200 7970,2290 8150,2290 U10.4@8210,2350
  Bottom Layer w7.87: U17.2@4250,5760 U17.2@4250.63,5760.63 ; C13.2@4799.37,5760.63 C13.2@4800,5760
  Bottom Layer w40: Q1.1@2800,3850 2800,3740 ; U12.11@3300,5150 3300,5300 ; U17.2@4250,5760 4250,5580 3580,5580 R77.1@3400,5400 R76.1@3400,5300 3250,5300 R79.1@3200,5300 R78.1@3200,5400 3100,5500 2550,5500 2550,3740 2800,3740 ; U17.2@4250.63,5760.63 C3.2@4590,5760.63 C13.2@4799.37,5760.63 ; C13.2@4800,5760 4865.91,5694.09 D11.1@5160,5694.09 5534.09,5694.09 PWR.1@5690,5850 ; U14.6@5450,4950 U14.7@5550,4950 U14.10@5550,5250 ; R24.1@6400,3680 6400,3850 ; Q32.1@6920,5100 7100,5100 ; MANUAL.1@7120,5300 7120,5120 7100,5100 ; R91.2@7200,5000 7100,5100 ; Q24.1@7500,3850 7400,3750 7200,3750 Q22.1@7100,3850 Q21.1@6900,3850 6800,3750 6600,3750 Q19.1@6500,3850 6400,3850 ; 2800,3740 2920,3620 3170,3620 3300,3750 Q3.1@3300,3850 Q4.1@3500,3850 3600,3750 3800,3750 Q6.1@3900,3850 Q7.1@4100,3850 4200,3750 4400,3750 Q9.1@4500,3850 Q10.1@4700,3850 4800,3750 5000,3750 Q12.1@5100,3850 Q13.1@5300,3850 5400,3750 5600,3750 Q15.1@5700,3850 Q16.1@5900,3850 6000,3750 6200,3750 Q18.1@6300,3850 6400,3850
-VCC: C45.2 R117.1 U18.4 U19.4 U20.4 U21.4 U22.4 U23.4 U24.4 U25.4 | length 7715.4
  Top Layer w40: U25.4@9200,4000 9200,4470 9580,4850 10480,4850 ; U18.4@10410,4780 10480,4850 ; U19.4@11110,4760 11110,4850 ; U20.4@11810,4760 11810,4850 ; U21.4@12510,4760 12510,4850 ; U22.4@13190,4740 13190,4850 ; U23.4@13850,4740 13850,4850 ; U24.4@14510,4740 14400,4850 13850,4850 ; 10480,4850 11110,4850 ; 11110,4850 11810,4850 ; 11810,4850 12510,4850 ; 12510,4850 13190,4850 ; 13190,4850 13850,4850
  Bottom Layer w40: R117.1@9170,2950 C45.2@9170,3249.37 ; C45.2@9170.63,3250 9100,3320.63 9100,3940 9160,4000 U25.4@9200,4000
GND: AC.2 AC.4 C1.1 C2.2 C3.1 C4.2 C6.2 C7.1 C9.1 C11.2 C12.2 C13.1 C16.1 C44.2 C45.1 CH.1 D10.2 D11.2 D12.1 DEPTH.3 DEPTH_CV.2 IN.1 LAG.2 OUT.2 PWR2.2 PWR.2 Q30.2 Q31.2 R26.2 R50.1 R52.1 R53.1 R54.1 R55.1 R56.1 R57.1 R58.1 R59.1 R60.1 R61.1 R62.1 R63.1 R64.1 R65.1 R66.1 R67.1 R68.1 R69.1 R72.2 R75.2 R82.1 R86.2 R92.1 R114.1 R115.1 RATE.3 RATE_CV.2 SCAN_CV.2 U11.3 U12.4 U13.5 U14.4 U14.13 U15.2 U15.5 U16.3 U17.1 | length 44.2
  Top Layer w7.87: U14.4@5250,4930 U14.4@5250,4950
  Bottom Layer w7.87: PWR.2@5690,5950 PWR.2@5690,5960 ; Q31.2@6735.77,5050 Q31.2@6750,5050
NetAC_1: AC.1 BRIDGE.2 | length 439.7
  Bottom Layer w40: AC.1@2510,5800 2570,5800 2690.04,5679.96 BRIDGE.2@2899.96,5679.96
NetAC_5: AC.5 BRIDGE.4 | length 982.6
  Bottom Layer w40: AC.5@2510,6000 2510,6040 2700,6230 3190.08,6230 BRIDGE.4@3320.04,6100.04
NetBRIDGE_1: BRIDGE.1 C2.1 U16.1 | length 1232
  Bottom Layer w40: BRIDGE.1@2899.96,6100.04 3000,6000 3550,6000 3649.37,6099.37 C2.1@3750,6099.37 U16.1@4049.37,6099.37
NetBRIDGE_3: BRIDGE.3 C1.2 U17.3 | length 902.4
  Bottom Layer w7.87: 4139.37,5680.63 4150,5691.26
  Bottom Layer w40: BRIDGE.3@3320.71,5680.63 C1.2@3750,5680.63 ; C1.2@3760,5680 4149.37,5680 ; 4150,5680 U17.3@4150,5748.74
NetC5_1: C5.1 LAG.1 | length 200.3
  Bottom Layer w7.87: C5.1@7899.37,5700 7900,5699.37 LAG.1@7900,5500
NetC5_2: C5.2 D10.1 R96.1 R97.2 | length 1594.4
  Bottom Layer w7.87: 7690,5570 7690,5000 ; 7690.31,5569.69 C5.2@7820.63,5700 7850,5729.37 ; D10.1@7729.76,4690 7690,4729.76 7690,5000 ; R96.1@7800,5000 7690,5000 ; 7850,5730 7850,5800.63 ; 7850,5800 7960,5800 8060,5700 R97.2@8100,5700
NetC6_1: C6.1 R47.3 R48.1 | length 557
  Top Layer w7.87: R48.1@7990,3600 R48.1@8000,3600
  Bottom Layer w7.87: C6.1@7900.63,3900 7900.63,3689.37 R48.1@7990,3600 R47.3@8200,3600
NetC7_2: C7.2 R45.2 R50.2 U1.6 U2.6 U3.6 U4.6 U5.6 U6.6 U7.6 U8.6 U9.6 U10.3 | length 9383.1
  Bottom Layer w7.87: U1.6@3170.71,3070.71 3349.29,3070.71 3349.29,2850.71 3949.29,2850.71 3949.29,3069.29 3947.87,3070.71 U2.6@3770.71,3070.71 ; 3950,2850 4550,2850 ; U3.6@4370.71,3070.71 4549.29,3070.71 4550,3070 4550,2850 ; U4.6@4971.42,3070 5150,3070 5150,2850 ; U5.6@5571.42,3070 5750,3070 5750,2850 ; U6.6@6171.42,3070 6350,3070 6350,2850 ; U7.6@6771.42,3070 6950,3070 6950,2850 ; U8.6@7371.42,3070 7550,3070 7550,2850 ; R45.2@7590,3500 7870.71,3219.29 U9.6@7870.71,3070.71 7999.29,3070.71 8100,2970 C7.2@8100,2910 8100,2900 8050,2850 ; U10.3@8210,2450 8160,2450 8100,2510 R50.2@8100,2600 8000,2700 8000,2800 8050,2850 ; 4550,2850 5150,2850 ; 5150,2850 5750,2850 ; 5750,2850 6350,2850 ; 6350,2850 6950,2850 ; 6950,2850 7550,2850 ; 7550,2850 8050,2850
NetC8_1: C8.1 R49.1 R51.2 U10.6 | length 711.5
  Bottom Layer w7.87: R49.1@8500,2790 8590,2700 8590,2540 8508.66,2458.66 8508.66,2451.34 U10.6@8510,2450 ; R49.1@8500,2800 C8.1@8500,2920 R51.2@8500,3100